# EAGLE board CT_schematic (EAGLE 7.6.0)

Size 100 x 80 mm. Coordinates in mm from the lower left corner, seen from the top.
Outline: 0,0 100,0 100,80 0,80 0,0
Copper layers (1*16): Top 0.035mm / dielectric 1.5mm / Bottom 0.035mm
Design rules "default": minimum track width 10mil, minimum drill 24mil, track to track 8mil, track to pad 8mil, pad to pad 8mil, via to via 8mil, smd to smd 8mil, copper to edge 40mil, drill to drill 8mil, minimum pad ring 10mil, minimum via ring 8mil, stop-mask expansion 4mil, vias tented up to drill 0mil, thermal gap 10mil

## Footprints (pad centres in the part's own frame; a part is rotated, then mirrored left to right if it is on the bottom)
C0603 = smd 0.8 x 0.8: 1 -0.762,0; 2 0.762,0
C0402 = smd 0.5 x 0.5: 1 -0.508,0; 2 0.508,0
C1210 = smd 1.2 x 2.5: 1 -1.524,0; 2 1.524,0
C0805 = smd 1.2 x 1.3: 1 -1.016,0; 2 1.016,0
C1206 = smd 1.3 x 1.6: 1 -1.524,0; 2 1.524,0
EXV-9H = smd 3.505 x 1.676: 1 -2.857,0; 2 2.857,0
L0603 = smd 0.8 x 0.8: 1 -0.762,0; 2 0.762,0
PJ-037B_PACKAGE = drill 3.7 square: 1 12,0 | drill 3.2 square: 2 6,0
R0603 = smd 0.8 x 0.8: 1 -0.762,0; 2 0.762,0
UFBGA100 = smd 0.28 x 0.28: A1 -2.75,2.75; A2 -2.25,2.75; A3 -1.75,2.75; A4 -1.25,2.75; A5 -0.75,2.75; A6 -0.25,2.75; A7 0.25,2.75; A8 0.75,2.75; A9 1.25,2.75; A10 1.75,2.75; A11 2.25,2.75; A12 2.75,2.75; B1 -2.75,2.25; B2 -2.25,2.25; B3 -1.75,2.25; B4 -1.25,2.25; B5 -0.75,2.25; B6 -0.25,2.25; B7 0.25,2.25; B8 0.75,2.25; B9 1.25,2.25; B10 1.75,2.25; B11 2.25,2.25; B12 2.75,2.25; C1 -2.75,1.75; C2 -2.25,1.75; C3 -1.75,1.75; C4 -1.25,1.75; C5 -0.75,1.75; C8 0.75,1.75; C9 1.25,1.75; C10 1.75,1.75; C11 2.25,1.75; C12 2.75,1.75; D1 -2.75,1.25; D2 -2.25,1.25; D3 -1.75,1.25; D10 1.75,1.25; D11 2.25,1.25; D12 2.75,1.25; E1 -2.75,0.75; E2 -2.25,0.75; E3 -1.75,0.75; E10 1.75,0.75; E11 2.25,0.75; E12 2.75,0.75; F1 -2.75,0.25; F2 -2.25,0.25; F11 2.25,0.25; F12 2.75,0.25; G1 -2.75,-0.25; G2 -2.25,-0.25; G11 2.25,-0.25; G12 2.75,-0.25; H1 -2.75,-0.75; H2 -2.25,-0.75; H3 -1.75,-0.75; H10 1.75,-0.75; H11 2.25,-0.75; H12 2.75,-0.75; J1 -2.75,-1.25; J2 -2.25,-1.25; J3 -1.75,-1.25; J10 1.75,-1.25; J11 2.25,-1.25; J12 2.75,-1.25; K1 -2.75,-1.75; K2 -2.25,-1.75; K3 -1.75,-1.75; K4 -1.25,-1.75; K5 -0.75,-1.75; K8 0.75,-1.75; K9 1.25,-1.75; K10 1.75,-1.75; K11 2.25,-1.75; K12 2.75,-1.75; L1 -2.75,-2.25; L2 -2.25,-2.25; L3 -1.75,-2.25; L4 -1.25,-2.25; L5 -0.75,-2.25; L6 -0.25,-2.25; L7 0.25,-2.25; L8 0.75,-2.25; L9 1.25,-2.25; L10 1.75,-2.25; L11 2.25,-2.25; L12 2.75,-2.25; M1 -2.75,-2.75; M2 -2.25,-2.75; M3 -1.75,-2.75; M4 -1.25,-2.75; M5 -0.75,-2.75; M6 -0.25,-2.75; M7 0.25,-2.75; M8 0.75,-2.75; M9 1.25,-2.75; M10 1.75,-2.75; M11 2.25,-2.75; M12 2.75,-2.75
A2200-A = smd 1.5 x 0.8: 1 -4.85,6.35; 2 -4.85,5.08; 3 -4.85,3.81; 4 -4.85,2.54; 5 -4.85,1.27; 6 -4.85,0; 7 -4.85,-1.27; 8 -4.85,-2.54; 9 -4.85,-3.81; 10 -4.85,-5.08; 11 -4.85,-6.35; 12 4.85,-6.35; 13 4.85,-5.08; 14 4.85,-3.81; 15 4.85,-2.54; 16 4.85,-1.27; 17 4.85,0; 18 4.85,1.27; 19 4.85,2.54; 20 4.85,3.81; 21 4.85,5.08; 22 4.85,6.35 | smd 1.2 x 1.2: 23 -2,2; 24 -2,0; 25 -2,-2; 26 0,-2; 27 0,0; 28 0,2; 29 2,2; 30 2,0; 31 2,-2
COAXIAL_C = smd 1 x 1: 1 0,-1.5; 2 0,1.5 | smd 1.05 x 2.2: 3 -1.475,0; 4 1.475,0
SOIC-8 = smd 1.6 x 0.6: 1 -2.7,1.905 | smd 1.55 x 0.6: 2 -2.7,0.635; 3 -2.7,-0.635; 4 -2.7,-1.905; 5 2.7,-1.905; 6 2.7,-0.635; 7 2.7,0.635; 8 2.7,1.905
ETRX3587 = smd 1 x 1.4: 1 0,0; 2 1.27,0; 3 2.54,0; 4 3.81,0; 5 5.08,0; 6 6.35,0; 7 7.62,0; 8 8.89,0; 9 10.16,0; 10 11.43,0; 11 12.7,0; 12 13.97,0; 13 15.24,0; 14 16.51,0; 15 17.78,0; 16 19.05,0; 17 20.32,0; 18 21.59,0; 19 22.86,0; 20 22.86,18.8; 21 21.59,18.8; 22 20.32,18.8; 23 19.05,18.8; 24 17.78,18.8; 25 16.51,18.8; 26 15.24,18.8; 27 13.97,18.8; 28 12.7,18.8; 29 11.43,18.8; 30 10.16,18.8; 31 8.89,18.8; 32 7.62,18.8; 33 6.35,18.8
QFN-28 = smd 0.813 x 0.305: 1 -2.451,1.5; 2 -2.451,1; 3 -2.451,0.5; 4 -2.451,0; 5 -2.451,-0.5; 6 -2.451,-1; 7 -2.451,-1.5; 15 2.451,-1.5; 16 2.451,-1; 17 2.451,-0.5; 18 2.451,0; 19 2.451,0.5; 20 2.451,1; 21 2.451,1.5 | smd 0.305 x 0.813: 8 -1.5,-2.451; 9 -1,-2.451; 10 -0.5,-2.451; 11 0,-2.451; 12 0.5,-2.451; 13 1,-2.451; 14 1.5,-2.451; 22 1.5,2.451; 23 1,2.451; 24 0.5,2.451; 25 0,2.451; 26 -0.5,2.451; 27 -1,2.451; 28 -1.5,2.451 | smd 3.607 x 3.607: 29 0,0
SJ-43515TS-SMT-TR = smd 2.2 x 3: 1 0.6,-7.4; 4 3.4,-7.4 | smd 3 x 3: 2 12.8,-7.4; 5 17,-3 | smd 2 x 3: 3 5.3,0; 6 2.5,0 | drill 1.8: P$7 4.5,-3.69; P$8 11.54,-3.69
ABS07-32.768KHZ-7-T = smd 1.1 x 2.4: 1 -2.5,0; 2 0,0
ABLS-25.000MHZ-B2F-T = smd 5.6 x 2.8: 1 -3.81,0; 2 5.69,0
ASFL1 = smd 1.7 x 1.5: 1 -1.27,-1.1; 2 1.27,-1.1; 3 1.27,1.1; 4 -1.27,1.1
WSON-8 = smd 0.3 x 0.6: 1 -0.75,0; 2 0.05,0; 3 0.85,0; 4 1.65,0; 5 1.65,3.8; 6 0.85,3.8; 7 0.05,3.8; 8 -0.75,3.8 | smd 3 x 2.6: PAD 0.45,1.9
SON-6 = smd 0.55 x 0.3: 1 -0.355,0.5 | smd 0.52 x 0.3: 2 -0.37,0; 3 -0.37,-0.5; 4 0.37,-0.5; 5 0.37,0; 6 0.37,0.5
SW_4-1437565-2 = smd 1.4 x 2.1: 1 -2.23,4.55; 2 -2.23,-4.55; 3 2.23,4.55; 4 2.23,-4.55
LGM67K-G1J2-24-Z = smd 0.8 x 1.4: A -2,0; C 0,0
NC7SZ125M5X = smd 1.3 x 0.7: 1 -1.3,0.95; 2 -1.3,0; 3 -1.3,-0.95; 4 1.3,-0.95; 5 1.3,0.95

## Placement (x,y rotation side)
C1  1e-06  [C0603]  -26.67,80.01 0 top  (outside the outline)
C2  1e-07  [C0603]  -30.48,80.01 0 top  (outside the outline)
C3  1e-07  [C0603]  -34.29,80.01 0 top  (outside the outline)
C4  1e-07  [C0603]  -38.1,80.01 0 top  (outside the outline)
C5  1e-07  [C0603]  -41.91,80.01 0 top  (outside the outline)
C6  1e-07  [C0603]  -45.72,80.01 0 top  (outside the outline)
C7  1e-07  [C0603]  -49.53,80.01 0 top  (outside the outline)
C8  4.7e-06  [C0603]  -15.24,80.01 0 top  (outside the outline)
C9  1e-08  [C0603]  -53.34,80.01 0 top  (outside the outline)
C10  1e-06  [C0603]  -57.15,80.01 0 top  (outside the outline)
C11  2.2e-06  [C0603]  -19.05,80.01 0 top  (outside the outline)
C12  2.2e-06  [C0603]  -22.86,80.01 0 top  (outside the outline)
C13  1e-11  [C0402]  -30.48,85.09 0 top  (outside the outline)
C14  1e-11  [C0402]  -34.29,85.09 0 top  (outside the outline)
C15  1e-11  [C0402]  -38.1,85.09 0 top  (outside the outline)
C16  1e-11  [C0402]  -41.91,85.09 0 top  (outside the outline)
C17  1e-07  [C0402]  -45.72,85.09 0 top  (outside the outline)
C18  1e-08  [C0402]  -49.53,85.09 0 top  (outside the outline)
C19  1e-07  [C0402]  -53.34,85.09 0 top  (outside the outline)
C20  2.2e-05  [C1210]  -78.74,60.96 0 top  (outside the outline)
C21  2.2e-05  [C1210]  -16.51,68.58 0 top  (outside the outline)
C22  1e-09  [C0402]  -57.15,85.09 0 top  (outside the outline)
C23  1e-09  [C0402]  -60.96,85.09 0 top  (outside the outline)
C24  1e-07  [C0402]  -64.77,85.09 0 top  (outside the outline)
C25  1e-07  [C0402]  -68.58,85.09 0 top  (outside the outline)
C26  1e-07  [C0402]  -72.39,85.09 0 top  (outside the outline)
C27  1e-07  [C0402]  -76.2,85.09 0 top  (outside the outline)
C28  1e-07  [C0402]  -80.01,85.09 0 top  (outside the outline)
C29  1e-05  [C0805]  -53.34,68.58 0 top  (outside the outline)
C30  1e-05  [C0805]  -58.42,68.58 0 top  (outside the outline)
C31  1e-05  [C0805]  -63.5,68.58 0 top  (outside the outline)
C32  1e-05  [C0805]  -68.58,68.58 0 top  (outside the outline)
C33  1e-05  [C0805]  -73.66,68.58 0 top  (outside the outline)
C34  1e-08  [C0402]  -83.82,85.09 0 top  (outside the outline)
C35  1e-08  [C0402]  -15.24,90.17 0 top  (outside the outline)
C36  1e-05  [C1206]  -29.21,68.58 0 top  (outside the outline)
C37  1e-05  [C1210]  -22.86,68.58 0 top  (outside the outline)
C38  1e-07  [C0402]  -19.05,90.17 0 top  (outside the outline)
C39  0.0001  [EXV-9H]  -49.53,53.34 0 top  (outside the outline)
C40  0.0001  [EXV-9H]  -60.96,53.34 0 top  (outside the outline)
C41  1e-08  [C0402]  -22.86,90.17 0 top  (outside the outline)
C42  1e-08  [C0402]  -26.67,90.17 0 top  (outside the outline)
C43  1e-08  [C0402]  -30.48,90.17 0 top  (outside the outline)
F1  240.0  [L0603]  -60.96,80.01 0 top  (outside the outline)
J1  PJ-037B  [PJ-037B_PACKAGE]  -83.82,30.48 0 top  (outside the outline)
R2  1000.0  [R0603]  -64.77,80.01 0 top  (outside the outline)
R7  4700.0  [R0603]  -68.58,80.01 0 top  (outside the outline)
R8  4700.0  [R0603]  -72.39,80.01 0 top  (outside the outline)
R9  4700.0  [R0603]  -76.2,80.01 0 top  (outside the outline)
R10  2200.0  [R0603]  -80.01,80.01 0 top  (outside the outline)
R12  2200.0  [R0603]  -83.82,80.01 0 top  (outside the outline)
R14  10000.0  [R0603]  -20.32,74.93 0 top  (outside the outline)
R15  10000.0  [R0603]  -25.4,74.93 0 top  (outside the outline)
R16  10000.0  [R0603]  -30.48,74.93 0 top  (outside the outline)
R17  10000.0  [R0603]  -35.56,74.93 0 top  (outside the outline)
R18  10000.0  [R0603]  -40.64,74.93 0 top  (outside the outline)
R19  10000.0  [R0603]  -45.72,74.93 0 top  (outside the outline)
R20  10000.0  [R0603]  -50.8,74.93 0 top  (outside the outline)
R21  10000.0  [R0603]  -55.88,74.93 0 top  (outside the outline)
R22  47000.0  [R0603]  -60.96,74.93 0 top  (outside the outline)
R23  47000.0  [R0603]  -66.04,74.93 0 top  (outside the outline)
R24  47000.0  [R0603]  -71.12,74.93 0 top  (outside the outline)
R25  680.0  [R0603]  -15.24,85.09 0 top  (outside the outline)
R26  100000.0  [R0603]  -78.74,68.58 0 top  (outside the outline)
R27  2231.0  [R0603]  -19.05,85.09 0 top  (outside the outline)
R28  1000.0  [R0603]  -22.86,85.09 0 top  (outside the outline)
R29  10000.0  [R0603]  -76.2,74.93 0 top  (outside the outline)
R30  10000.0  [R0603]  -81.28,74.93 0 top  (outside the outline)
R31  9100.0  [R0603]  -26.67,85.09 0 top  (outside the outline)
R32  680000.0  [R0603]  -83.82,68.58 0 top  (outside the outline)
R33  120000.0  [R0603]  -15.24,74.93 0 top  (outside the outline)
U1  STM32F401VDH6  [UFBGA100]  -44.45,43.18 0 top  (outside the outline)
U2  A2200-A  [A2200-A]  -57.15,10.16 0 top  (outside the outline)
U3  73412-0114  [COAXIAL_C]  -41.91,53.34 0 top  (outside the outline)
U4  AT25020B-SSHL-T  [SOIC-8]  -59.69,41.91 0 top  (outside the outline)
U5  ETRX3587  [ETRX3587]  -48.26,1.27 0 top  (outside the outline)
U6  WM8731CLSEFL  [QFN-28]  -71.12,60.96 0 top  (outside the outline)
U7  SJ-43515TS-SMT-TR  [SJ-43515TS-SMT-TR]  -39.37,31.75 0 top  (outside the outline)
U8  SJ-43515TS-SMT-TR  [SJ-43515TS-SMT-TR]  -67.31,31.75 0 top  (outside the outline)
U9  ABS07-32.768KHZ-7-T  [ABS07-32.768KHZ-7-T]  -49.53,62.23 0 top  (outside the outline)
U10  ABLS-25.000MHZ-B2F-T  [ABLS-25.000MHZ-B2F-T]  -26.67,62.23 0 top  (outside the outline)
U11  ASFL1-12.288MHZ-EC-T  [ASFL1]  -30.48,53.34 0 top  (outside the outline)
U12  LP3878SDX-ADJ/NOPB  [WSON-8]  -81.28,40.64 0 top  (outside the outline)
U13  TPS3895ADRYR  [SON-6]  -33.02,88.9 0 top  (outside the outline)
U14  4-1437565-2  [SW_4-1437565-2]  -27.94,43.18 0 top  (outside the outline)
U15  Q65110A2395  [LGM67K-G1J2-24-Z]  -58.42,60.96 0 top  (outside the outline)
U16  nc7sz125m5x  [NC7SZ125M5X]  -34.29,68.58 0 top  (outside the outline)
U17  nc7sz125m5x  [NC7SZ125M5X]  -40.64,68.58 0 top  (outside the outline)
U18  nc7sz125m5x  [NC7SZ125M5X]  -46.99,68.58 0 top  (outside the outline)

## Library data of the parts
C1-C43 F1 J1 R2 R7-R10 R12 R14-R33 U1-U18 = circuit_tree

## Nets
CLK_CRYSTAL_U1_D1: C13.1 U1.D1 U9.1
CLK_CRYSTAL_U1_E1: C14.1 U1.E1 U9.2
CLK_CRYSTAL_U1_F1: C15.1 U1.F1 U10.1
CLK_CRYSTAL_U1_G1: C16.1 U1.G1 U10.2
CLK_U6_1: U6.1 U11.3
GND: C1.2 C2.2 C3.2 C4.2 C5.2 C6.2 C7.2 C8.2 C9.2 C10.2 C11.2 C12.2 C13.2 C14.2 C15.2 C16.2 C17.2 C18.2 C19.2 C23.2 C24.2 C25.2 C26.2 C27.2 C28.2 C29.2 C30.2 C31.2 C32.2 C33.2 C34.2 C35.2 C36.2 C37.2 C38.2 C39.2 C40.2 C41.2 C42.2 C43.2 J1.2 R2.2 R14.2 R16.2 R21.2 R22.2 R23.2 R24.2 R28.2 R31.2 R33.2 U1.D3 U1.F2 U1.F11 U1.F12 U1.J1 U1.K1 U2.7 U2.8 U2.23 U2.24 U2.25 U2.26 U2.27 U2.28 U2.29 U2.30 U2.31 U4.4 U5.1 U5.13 U5.19 U5.20 U5.31 U5.33 U6.4 U6.15 U6.19 U6.25 U6.26 U6.29 U7.1 U8.1 U11.2 U12.3 U12.PAD U13.2 U15.C U16.1 U16.3 U17.1 U17.3 U18.1 U18.3
NET_U1_A3: R10.1 U1.A3 U2.15
NET_U1_A4: R14.1 U1.A4
NET_U1_B4: R12.1 U1.B4 U2.16
NET_U1_C11: C12.1 U1.C11
NET_U1_E3: R16.1 U1.E3
NET_U1_H2: R9.1 U1.H2 U18.4
NET_U1_H3: R15.1 U1.H3
NET_U1_L11: C11.1 U1.L11
NET_U1_M1: C9.1 C10.1 F1.1 U1.L1 U1.M1
NET_U1_M11: U15.A
NET_U1_M12: U14.3 U14.4
NET_U2_2: R17.2 U2.2
NET_U2_6: U2.6
NET_U2_17: R17.1 U2.17
NET_U2_19: U2.19
NET_U2_22: R7.1 U2.22 U16.4
NET_U3_1: U2.11 U3.1
NET_U3_2: U2.10 U3.2 U3.3 U3.4
NET_U4_3: R18.1 U4.3
NET_U4_7: R20.1 U4.7
NET_U5_7: R8.1 U5.7 U17.4
NET_U5_21: R21.1 U5.21
NET_U6_9: U6.9
NET_U6_20: C28.1 C33.1 U6.20
NET_U7_2: C21.1 R23.1 U7.2
NET_U7_5: C20.1 R22.1 U7.5
NET_U7_13: C20.2
NET_U7_14: C21.2
NET_U8_5: C22.1 C23.1 R24.1 R25.1 U8.5
NET_U8_21: R25.2
NET_U8_22: C22.2
NET_U12_1: C35.1 U12.1
NET_U12_6: R27.2 R28.1 U12.6
NET_U12_8: R26.1 U12.8
NET_U13_1: R30.1 R31.1 U13.1
NET_U13_3: R32.2 R33.1 U13.3
NET_U13_4: R29.1 U13.4 U16.2 U17.2 U18.2
NET_U14_1: R2.1 U14.1 U14.2
PROC_I2S2_CK: U1.B8 U6.7
PROC_I2S2_EXT_SD: U1.J3 U6.10
PROC_I2S2_SD: U1.K2 U6.8
PROC_I2S2_WS: U1.B3 U6.9 U6.11
PROC_SPI1_MISO: U1.A7 U4.2
PROC_SPI1_MOSI: U1.C5 U4.5
PROC_SPI1_NSS: R19.1 U1.A9 U4.1
PROC_SPI1_SCK: U1.A8 U4.6
PROC_USART1_CTS: U1.B12 U5.8
PROC_USART1_RTS: U1.A12 U5.6
PROC_USART1_RX: U1.C12 U5.17
PROC_USART1_TX: U1.B5 U5.18
VCC_S1_6V5: C36.1 C39.1 C40.1 J1.1 R26.2 U12.4
VCC_TIER1_3V3: C1.1 C2.1 C3.1 C4.1 C5.1 C6.1 C7.1 C8.1 C17.1 C18.1 C19.1 C24.1 C25.1 C26.1 C27.1 C29.1 C30.1 C31.1 C32.1 C34.1 C37.1 C38.1 C41.1 C42.1 C43.1 F1.2 R7.2 R8.2 R9.2 R10.2 R12.2 R15.2 R18.2 R19.2 R20.2 R27.1 R29.2 R30.2 R32.1 U1.C4 U1.E2 U1.G2 U1.G11 U1.G12 U2.20 U4.8 U5.32 U6.3 U6.5 U6.12 U6.18 U11.4 U12.5 U13.6 U16.5 U17.5 U18.5

## Tracks (layer width: path | path; a pad name or v marks a point on that pad's centre or on a via)
CLK_CRYSTAL_U1_D1  (2 unrouted)
CLK_CRYSTAL_U1_E1  (2 unrouted)
CLK_CRYSTAL_U1_F1  (2 unrouted)
CLK_CRYSTAL_U1_G1  (2 unrouted)
CLK_U6_1  (1 unrouted)
GND  (93 unrouted)
NET_U1_A3  (2 unrouted)
NET_U1_A4  (1 unrouted)
NET_U1_B4  (2 unrouted)
NET_U1_C11  (1 unrouted)
NET_U1_E3  (1 unrouted)
NET_U1_H2  (2 unrouted)
NET_U1_H3  (1 unrouted)
NET_U1_L11  (1 unrouted)
NET_U1_M1  (4 unrouted)
NET_U1_M12  (1 unrouted)
NET_U2_2  (1 unrouted)
NET_U2_17  (1 unrouted)
NET_U2_22  (2 unrouted)
NET_U3_1  (1 unrouted)
NET_U3_2  (3 unrouted)
NET_U4_3  (1 unrouted)
NET_U4_7  (1 unrouted)
NET_U5_7  (2 unrouted)
NET_U5_21  (1 unrouted)
NET_U6_20  (2 unrouted)
NET_U7_2  (2 unrouted)
NET_U7_5  (2 unrouted)
NET_U8_5  (4 unrouted)
NET_U12_1  (1 unrouted)
NET_U12_6  (2 unrouted)
NET_U12_8  (1 unrouted)
NET_U13_1  (2 unrouted)
NET_U13_3  (2 unrouted)
NET_U13_4  (4 unrouted)
NET_U14_1  (2 unrouted)
PROC_I2S2_CK  (1 unrouted)
PROC_I2S2_EXT_SD  (1 unrouted)
PROC_I2S2_SD  (1 unrouted)
PROC_I2S2_WS  (2 unrouted)
PROC_SPI1_MISO  (1 unrouted)
PROC_SPI1_MOSI  (1 unrouted)
PROC_SPI1_NSS  (2 unrouted)
PROC_SPI1_SCK  (1 unrouted)
PROC_USART1_CTS  (1 unrouted)
PROC_USART1_RTS  (1 unrouted)
PROC_USART1_RX  (1 unrouted)
PROC_USART1_TX  (1 unrouted)
VCC_S1_6V5  (5 unrouted)
VCC_TIER1_3V3  (56 unrouted)